# Altium PCB LINUX.PcbDoc
Units mm, origin at the board's own origin, x right, y up, seen from the top; angles counter-clockwise.
Board outline 120.4 x 55 mm, 2 copper layers (Top Layer, Bottom Layer); 73 components, 34 nets, 193 pads, 136 vias.
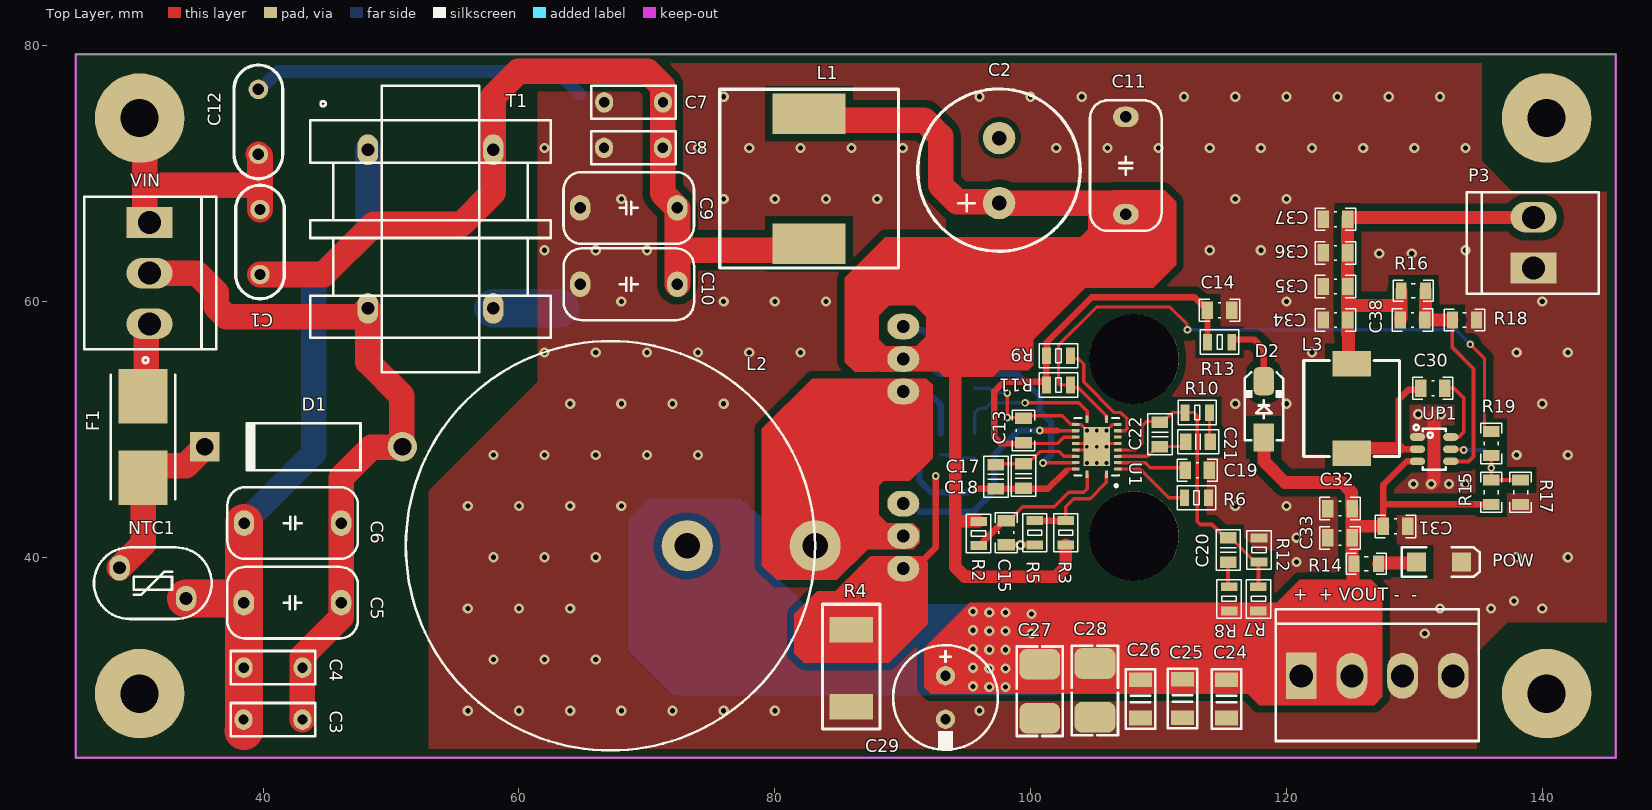
[diagram p0: Top Layer view]
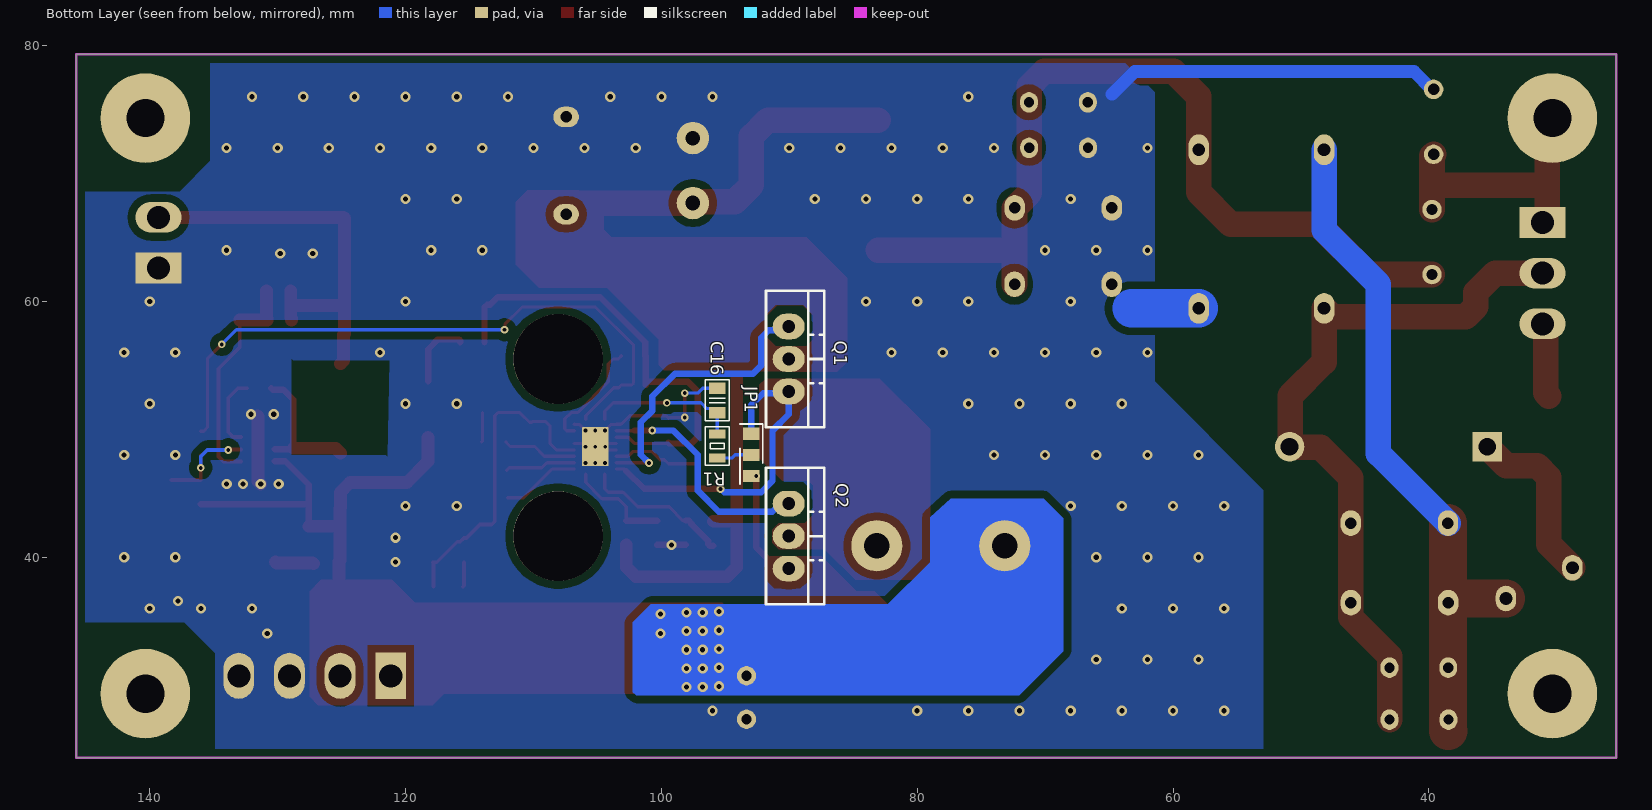
[diagram p1: Bottom Layer view, seen from below]
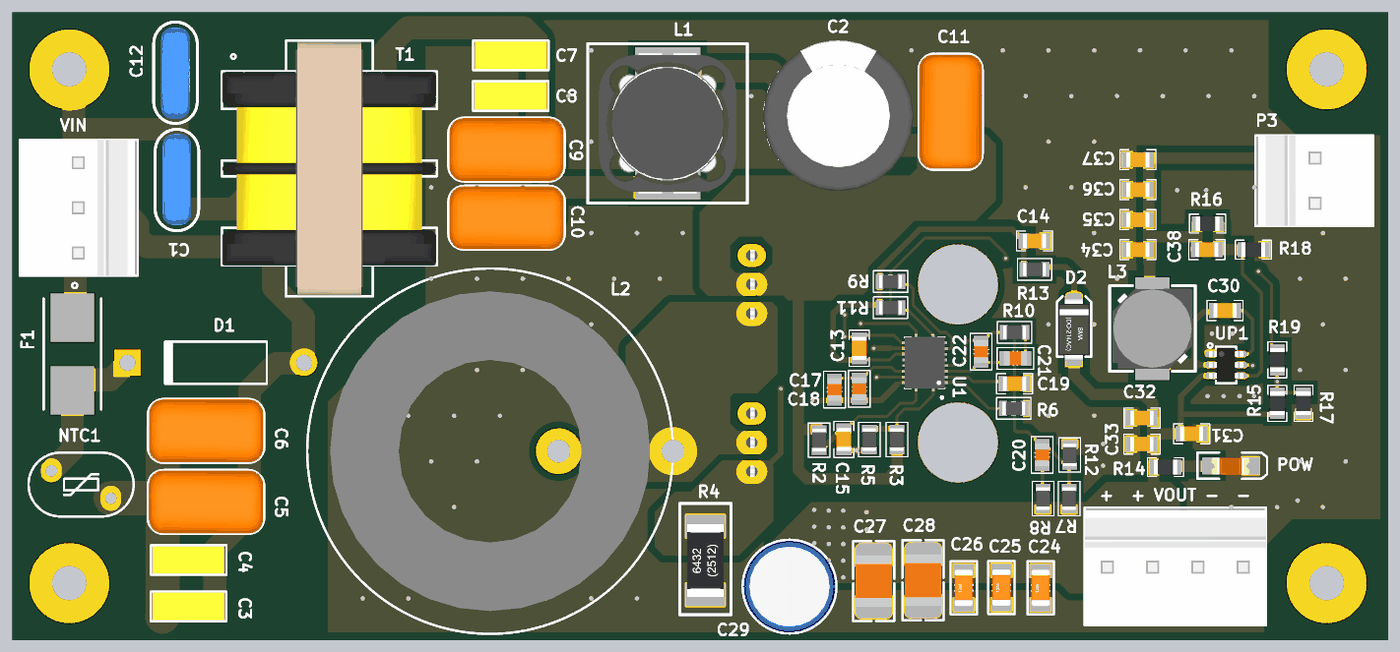
[diagram p2: 3D render of the assembled board from above, using the file's embedded part models]
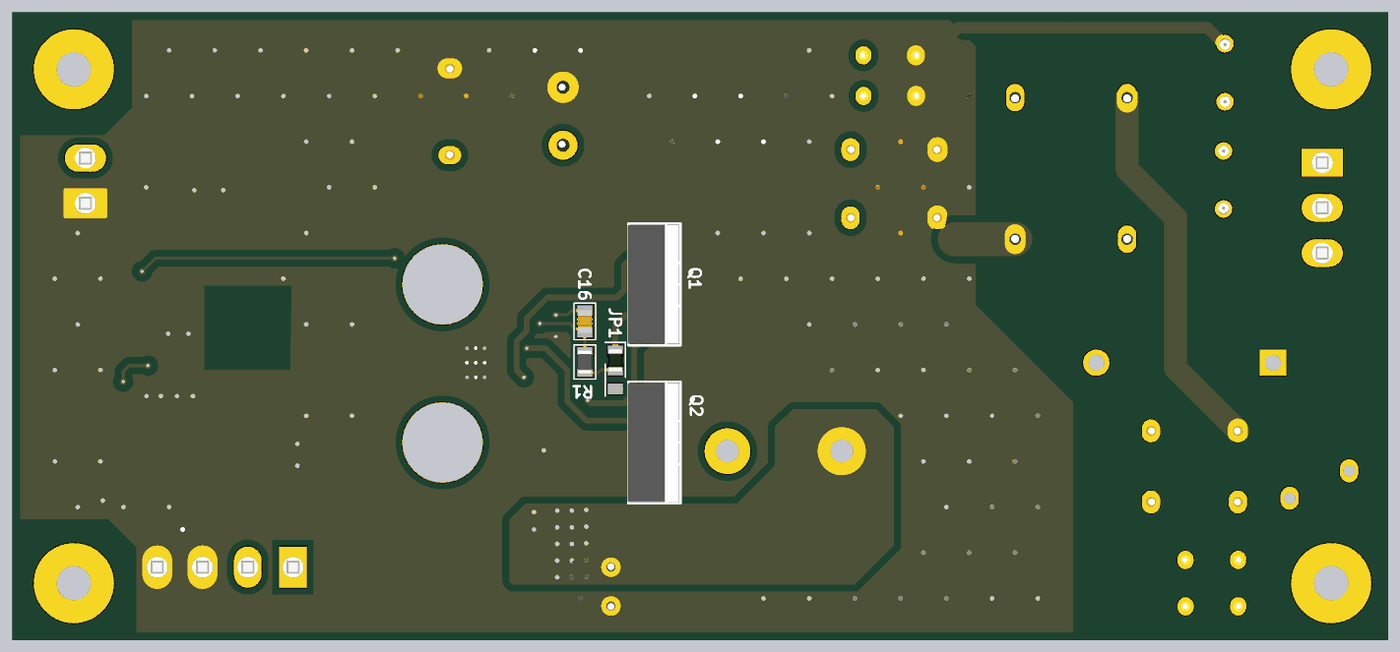
[diagram p3: 3D render of the assembled board from below, using the file's embedded part models]

## Layer stack, top to bottom
Top Solder: solder mask 0.0102, Solder Resist, Dk 3.5
Top Layer: signal copper 0.0356
Dielectric 1: dielectric 0.32, FR-4, Dk 4.8
Bottom Layer: signal copper 0.0356
Bottom Solder: solder mask 0.0102, Solder Resist, Dk 3.5

## Board outline
25.335,24.337 25.335,79.337 145.731,79.337 145.731,24.337

## Design rules (kind name [scope] priority, off if disabled: settings)
Clearance [All] p1: gap=0.3 ignorepadtopadclearanceinfootprint=FALSE except(0.2: Arc-Arc Arc-Track Arc-SMDPad Track-Track Track-SMDPad SMDPad-SMDPad; 0.254: Arc-THPad Arc-Via Arc-Text Track-THPad Track-Via Track-Text SMDPad-THPad SMDPad-Via SMDPad-Text THPad-THPad THPad-Via THPad-Text Via-Via Via-Text Fill-Text Poly-Text Region-Text Text-Text)
Height [All] p1: minheight=0 maxheight=80 prefheight=12.7
PolygonConnect [All] p1: connectstyle=Direct reliefconductorwidth=0.254 reliefentries=4 polygonreliefangle="90 Angle" airgapwidth=0.254
RoutingVias [All] p1: holewidth=0.4 width=0.8 viastyle="Through Hole" minholewidth=0.3 minwidth=0.6 maxholewidth=1.5 maxwidth=2.5
SolderMaskExpansion [All] p1: expansion=0.102 istentingtop=FALSE
Width [All] p1: maxlimit=3 minlimit=0.254 preferedwidth=0.5
29 further rules are at their usual default settings.

## Components (designator, comment, footprint, x,y, rotation, side; value= is the part's Value field where it differs from the comment)
"+  + VOUT -  -" "CONN_PWL_4" PWL_4 127.098,30.734 r0 top (schematic designator OUTPUT)
C1 "C_NP_200" "Cap_HV 5" 39.751,67.183 r270 top
C2 "150uF/100V" CAP-0.5in 97.49,70.089 r90 top
C3 "100nF" C_PLY_6X2_5 40.767,27.305 r180 top
C4 "470nF" C_PLY_6X2_5 40.781,31.369 r180 top
C5 "1uF" C_PLY_10X5 42.291,36.449 r180 top
C6 "2.2uF" C_PLY_10X5 42.301,42.672 r180 top
C7 "100nF" C_PLY_6X2_5 68.961,75.565 r0 top
C8 "470nF" C_PLY_6X2_5 68.947,72.009 r0 top
C9 "1uF" C_PLY_10X5 68.58,67.31 r0 top
C10 "2.2uF" C_PLY_10X5 68.59,61.341 r0 top
C11 "2.2uF" C_PLY_10X5 107.442,70.622 r270 top
C12 "C_NP_200" "Cap_HV 5" 39.624,71.501 r90 top
C13 "10uF" CAP0805 99.441,49.911 r90 top
C14 "100nF" CAP0805 114.775,59.309 r0 top
C15 "100nF" CAP0805 98.095,41.92 r270 top
C16 "100nF" C0805 95.631,52.258 r270 bottom
C17 "100nF" C0805 99.441,46.355 r90 top
C18 "100nF" C0805 97.282,46.294 r90 top
C19 "56nF" CAP0805 113.03,46.803 r0 top
C20 "820pF" C0805 115.443,40.564 r90 top
C21 "8.2nF" C0805 113.096,49.022 r180 top
C22 "470pF" C0805 110.109,49.606 r270 top
C24 "1nF" C1206 115.316,28.932 r90 top
C25 "100nF" C1206 111.887,28.956 r90 top
C26 "10uF" C1206 108.585,28.932 r90 top
C27 "100uF" C1812 100.711,29.523 r90 top
C28 "100uF" C1812 105.029,29.591 r90 top
C29 "220uF" C_EL_8X12 93.345,29.034 r270 top
C30 "100nF" CAP0805 131.445,53.213 r180 top
C31 "10uF" CAP0805 128.524,42.418 r0 top
C32 "100nF" CAP0805 124.183,43.801 r180 top
C33 "10uF" CAP0805 124.178,41.515 r180 top
C34 "10uF" CAP0805 123.825,58.547 r180 top
C35 "100nF" CAP0805 123.825,61.172 r180 top
C36 "10uF" CAP0805 123.825,63.796 r180 top
C37 "10uF" CAP0805 123.825,66.421 r180 top
C38 "100nF" CAP0805 129.86,58.547 r180 top
D1 "1.5KE120" A-500 43.158,48.641 r180 top
D2 "SS34" D_SMA 118.237,51.562 r90 top
F1 "0154004.DR" FUSE_0154004.DR 30.607,49.403 r270 top
JP1 "Jumper" "Jumper Selector SMD" 92.964,48.007 r270 bottom
L1 "=Value" CDRH127 82.677,69.596 r0 top
L2 "=Value" L_TOR 83.152,40.894 r180 top
L3 "22uH" CDRH74 125.095,51.633 r0 top
NTC1 "NTC-05D-15" MOV_7D 31.369,37.973 r0 top
P3 "CONN_PWL_2" PWL_2 139.319,64.591 r90 top
POW "LED0805" "LED SMD 1206" 131.925,39.624 r0 top (schematic designator POW1)
Q1 "IRF5305" TO220_3 90.043,55.499 r270 bottom
Q2 "IRF5305" TO220_3 90.043,41.656 r270 bottom
R1 "18k" R_0805 95.631,48.702 r270 bottom
R2 "2.1R" R_0805 95.936,41.859 r90 top
R3 "75k" R_0805 102.743,41.91 r90 top
R4 "10mR" R2512 85.979,31.321 r90 top
R5 "7.8k" R_0805 100.33,41.91 r270 top
R6 "39.2k" R_0805 112.964,44.644 r0 top
R7 "18k" R_0805 117.805,36.744 r90 top
R8 "24.9R" R_0805 115.519,36.744 r90 top
R9 "10k" R_0805 102.184,55.753 r180 top
R10 "2.87k" R_0805 113.03,51.308 r0 top
R11 "10k" R_0805 102.184,53.467 r180 top
R12 "1.27k" R_0805 117.856,40.564 r90 top
R13 "2.1R" R_0805 114.775,56.82 r180 top
R14 "4.7K" RES0805 126.238,39.497 r180 top
R15 "4.7K" RES0805 136.017,45.085 r270 top
R16 "15K" RES0805 129.921,60.833 r0 top
R17 "1K" RES0805 138.303,45.085 r90 top
R18 "2K" RES0805 133.919,58.547 r180 top
R19 "1K" RES0805 136.017,48.895 r90 top
T1 "EMI_TRANS" CMCHOKE_UU16 53.086,65.659 r180 top
U1 "LM5146" QFN50P450X350X100-21N 105.169,48.641 r180 top
UP1 "TPS54202" SOT23_6 131.542,48.448 r0 top
VIN "CONN_PWL_3" PWL_3 31.115,62.207 r270 top (schematic designator P1)

## Footprints (in the part's own frame and the unit in brackets; to place one, negate y for a bottom-side part, rotate by r counter-clockwise, add the part's x,y. Pads: shape width x height; smd on the part's side, far side on the other; paste and mask are expansions set on the pad)
A-500 [mm] "Diode, Axial; Body 8.9 x 3.7 mm (LxDia. max), Lead Dia. 1.09 mm (max)"
  round 2.3 hole 1.4: 1(-7.725,0)
  rect 2.3x2.3 hole 1.4: 2(7.725,0)
  silkscreen extent -4.45,-1.85 4.55,1.85
C0805 [mm] "Capacitor Pattern"
  rect 0.9x1.3 smd: 1(-0.95,0) 2(0.95,0)
  silkscreen extent -1.6,-0.95 1.6,0.95, body extent -1,-0.63 1,0.62, height 0.6
C1206 [mm]
  rect 1.15x1.8 smd: 1(-1.5,0) 2(1.5,0)
  silkscreen extent -2.32,-1.15 2.33,1.15, body extent -1.6,-0.8 1.6,0.8, height 1
C1812 [mm] "Chip Capacitor, 4.5x3.2mm, 1612, 1812, 4532"
  rrect50% 2.4x3.2 smd mask+0.075: 1(-2.1,0) 2(2.1,0)
  silkscreen extent -3.5,-1.8 3.5,1.8, body extent -2.25,-1.6 2.25,1.6, height 2.5
C_EL_8X12 [mm] "Cap Elec, D8.0X12.0H pitch: 3.5mm, RB.14/.26, RB.15/.32"
  round 1.5 hole 0.8: 1(-1.7,0) 2(1.7,0)
  silkscreen extent -4.1,-4.1 4.1,4.1, body extent -4.02,-4.03 4.03,4.03, height 2.98
C_PLY_6X2_5 [mm] "CAP, FILM MKT, 6.3X2.4mm, pitch: 4.7mm"
  oval 1.4x1.6 hole 0.8 mask+0.075: 1(-2.3,0) 2(2.3,0)
  silkscreen extent -3.3,-1.3 3.3,1.3, body extent -3.15,-1.2 3.15,1.2, height 6.34
C_PLY_10X5 [mm] "CAP, POLYESTER, 10X5.5mm pitch: 7.6mm"
  oval 1.6x2 hole 0.9 unplated mask+0.075: 1(-3.8,0) 2(3.8,0)
  silkscreen extent -5.1,-2.8 5.1,2.8, body extent -5,-2.75 5,2.75, height 9
CAP0805 [mm] "Chip Capacitor, 2-Leads, Body 2/00x1/25mm, IPC Medium Density DESIGNER:ABBAS BASEREH"
  rect 0.9x1.35 smd: 1(-0.95,0) 2(0.95,0)
  silkscreen extent -1.58,-0.87 1.58,0.87, body extent -1.02,-0.65 1.02,0.65, height 0.5
CAP-0.5in [mil]
  round 100 hole 45: 1(105.59,-1.82) 2(-94.41,-1.82)
  silkscreen extent -243,-251 257,249, body extent -253,-265 267,255, height 1000
"Cap_HV 5" [mil]
  round 60 hole 35: 1(0,0) 2(200,0)
  silkscreen extent -75,-75 275,75, body extent -59,-50 256,49, height 453
CDRH74 [mm]
  rect 3x2 smd: 1(0,3.5) 2(0,-3.5)
  silkscreen extent -3.75,-3.75 3.75,3.75, body extent -3.5,-3.52 3.5,3.53, height 4.5
CDRH127 [mm]
  rect 5.715x3.175 smd: 1(0,5.08) 2(0,-5.08)
  silkscreen extent -6.98,-6.98 6.98,6.98, body extent -6,-6.17 6,6.17, height 6.23
CMCHOKE_UU16 [mm] "COMMON MODE CHOKE, UU16, UT2024"
  oval 1.6x2.4 hole 1: 1(4.9,-6.2) 2(-4.9,-6.2) 3(-4.9,6.2) 4(4.9,6.2)
  silkscreen extent -9.4,-11.2 9.4,11.2, body extent -9.35,-11.1 9.35,11.13, height 25.65
D_SMA [mm] "SMA Molded Diode, 2-Leads, Body 4.3x2.7mm, SOD-128"
  rect 2.2x1.6 smd paste-0.1: 1(-2.2,0)
  rrect50% 2.2x1.6 smd paste-0.1: 2(2.2,0)
  silkscreen extent -2.4,-1.5 2.9,1.5, body extent -2.75,-1.4 2.75,1.4, height 2.6
FUSE_0154004.DR [mm]
  rect 4.24x3.81 smd: 1(-3.19,0) 2(3.19,0)
  silkscreen extent -6.22,-2.51 4.86,2.51
"Jumper Selector SMD" [mm]
  rect 0.95x1.3 smd: 1(-1.65,0) 2(0,0) 3(1.65,0)
  silkscreen extent -2.41,-0.89 2.29,0.89, body extent -1.85,-0.64 0.18,0.64, height 0.6
L_TOR [mm]
  round 4 hole 2: 1(0,0) 2(10,0)
  silkscreen extent 0,-16 32,16, body extent 2.11,-13.97 30,13.97, height 11
"LED SMD 1206" [mm]
  rect 1.5x1.5 smd: 1(-1.75,0) 2(1.75,0)
  silkscreen extent -2.9,-1.15 3.2,1.15, body extent -1.65,-0.76 1.65,0.69, height 1.36
MOV_7D [mm] "VDR, VARISTOR, 9X5.6, pitch: 5.0mm, 275VAC(RMS)"
  oval 1.6x2 hole 1: 1(-2.6,1.2) 2(2.6,-1.2)
  silkscreen extent -4.6,-2.8 4.6,2.8, body extent -4.49,-2.8 4.49,2.8, height 12.5
PWL_2 [mm] "Connector; Header; 2 Position"
  rect 2.4x3.6 hole 1.8: 1(-1.98,0)
  oval 2.4x3.6 hole 1.8: 2(1.98,0)
  silkscreen extent -3.98,-5.1 3.96,5.21, body extent -3.96,-5 3.96,5, height 13.5
PWL_3 [mm] "Connector; Header; 3 Position"
  rect 2.4x3.6 hole 1.8: 1(-3.96,0)
  oval 2.4x3.6 hole 1.8: 2(0,0) 3(3.96,0)
  silkscreen extent -5.96,-5.1 5.94,5.21, body extent -5.94,-5 5.94,5, height 13.5
PWL_4 [mm] "Connector; Header; 4 Position"
  rect 2.4x3.6 hole 1.8: 1(-5.94,0)
  oval 2.4x3.6 hole 1.8: 2(-1.98,0) 3(1.98,0) 4(5.94,0)
  silkscreen extent -7.94,-5.1 7.92,5.21, body extent -7.92,-5 7.92,5, height 13.5
QFN50P450X350X100-21N [mm]
  rrect25% 0.24x0.6 smd mask+0: 1(-0.75,2.15) 10(-0.75,-2.15) 11(0.75,-2.15) 20(0.75,2.15)
  rrect25% 0.6x0.24 smd mask+0: 2(-1.65,1.75) 3(-1.65,1.25) 4(-1.65,0.75) 5(-1.65,0.25) 6(-1.65,-0.25) 7(-1.65,-0.75) 8(-1.65,-1.25) 9(-1.65,-1.75) 12(1.65,-1.75) 13(1.65,-1.25) 14(1.65,-0.75) 15(1.65,-0.25) 16(1.65,0.25) 17(1.65,0.75) 18(1.65,1.25) 19(1.65,1.75)
  round 0.4 hole 0.3 mask+0: 21(-0.775,0) 21(-0.762,1.27) 21(-0.762,-1.27) 21(0,1.275) 21(0,0) 21(0,-1.275) 21(0.762,1.27) 21(0.762,-1.27) 21(0.775,0)
  rrect5% 2.05x3.05 smd paste-3 mask+0: 21(0,0)
  rrect5% 2.05x3.05 smd far side paste-3 mask+0: 21(0,0)
  silkscreen extent -1.75,-2.25 1.75,3.15, body extent -1.75,-2.25 1.75,2.25, height 1
R2512 [mm]
  rect 2x3.4 smd: 1(-3,0) 2(3,0)
  silkscreen extent -4.75,-2.25 5,2.25, body extent -3.2,-1.6 3.2,1.6, height 0.6
R_0805 [mm] "Resistor Pattern"
  rect 0.7x1.3 smd: 1(-0.95,0) 2(0.95,0)
  silkscreen extent -1.5,-0.95 1.5,0.95, body extent -1,-0.6 1,0.6, height 0.5
RES0805 [mm] "Chip Resistor, 2-Leads, Body 2/00x1/25mm, IPC Medium Density DESIGNER:ABBAS BASEREH"
  rect 0.85x1.3 smd: 1(-0.95,0) 2(0.95,0)
  silkscreen extent -1.58,-0.82 1.58,0.82, body extent -1.02,-0.65 1.02,0.65, height 0.5
SOT23_6 [mm] "SOT-23-6, DDC, DBV, MICRO6, SOT-26, SOT457, SuperSOT6, TSOP-6, HMC313, TSOT, 1.5x3mm, Pitch 0.65mm, CA531, MO-178AB, MO-193AA"
  oval 1.2x0.6 smd paste-0.05: 1(-1.3,0.95) 2(-1.3,0) 3(-1.3,-0.95) 4(1.3,-0.95) 5(1.3,0) 6(1.3,0.95)
  silkscreen extent -1.6,-1.6 0.9,1.9, body extent -1.5,-1.5 1.5,1.5, height 1.3
TO220_3 [mm] "TO-220 3 LEAD, TO-262, pitch: 2.54mm  10x4.5mm"
  oval 2x2.5 hole 1: 1(-2.54,0) 2(0,0) 3(2.54,0)
  silkscreen extent -5.33,-1.78 5.33,2.79, body extent -5.2,-1.85 5.2,2.65, height 19

## Part data
"+  + VOUT -  -": "Power Terminal 4pin,Header, 4-Pin"
C2: library part "Cap Elec"
C3 C4 C5 C6 C7 C8 C9 C10 C11: library part CAP_THD_FILM_POLYESTER, "CAP, FILM,", ASSEMBLY=ASSEMBLY, DESC="CAP, FILM,", MANF=MANF, MANF_P#=MANF_PART#, PARAM2=400V, PRICE="100= 1$"
C13 C14 C15 C19 C24 C25 C26: library part "Cap 1206", "Capacitor"
C16 C17 C18 C20 C21 C22: library part "Cap 0805", "Capacitor"
C27 C28: library part CAP_SMD_MLCC, "CAP, MLCC, 1nF, 50V, C0G, 10%, 0402", ASSEMBLY=ASSEMBLY, DESC="CAP, MLCC, 1nF, 50V, C0G, 10%, 0402", MANF=Murata, MANF_P#=MANF_PART#, PARAM="C0G, 10%", PARAM2=50V, PRICE="100= 1$"
C29: library part CAP_THD_EL_8X12, "CAP, THD, ELEC,", ASSEMBLY=ASSEMBLY, DESC=DESCRIPTION, DIST#=MOUSER, MANF=MANF, MANF_P#=MANF_PART#, PARAM=20%, PARAM2=25V, PRICE="10= 5$"
C30 C31 C32 C33 C34 C35 C36 C37 C38: library part "CAP SMD PACKAGE", "TOTAL CAPACITOR SMD PACK", Data=2017-3-10, Desc.="CAP SMD TOTAL PACKAGES", Designer="Abbas Basereh"
D1: library part 1N5352B, "Silicon Zener Diode", ComponentLink1Description="Manufacturer Link", ComponentLink1URL=http://www.vishay.com/, LatestRevisionDate=17-Jul-2002, LatestRevisionNote="Re-released for DXP Platform.", PackageReference=A-500, Published=8-Jun-2000, Publisher="Altium Limited"
D2: library part DIODE_SMD_SCHOTTKY_SS34, "DIODE, SCHOTTKY, 20V, 3A", ASSEMBLY=ASSEMBLY, DESC=DESCRIPTION, MANF=VISHAY, MANF_P#=SS34, PARAM=20V, PARAM2=3A, PRICE=PRICE
F1: "154/154T/154L/154TL Series OMNI-BLOKÂ® Fuse and Holder Assembly", Package=None, Availability=Unavailable, MP=0154004.DR, PRICE=None
JP1: library part "Jumper Selector", "Jumper Selector"
L1 L3: library part L_CDRH127, "Inductor"
  L1: 10uH=10uH
L2: library part L_TOR, "Inductor", 15uH=15uH
NTC1: library part VARISTOR, "Varistor (Metal Oxiade Varistor)", MANF=MANF, MANF_P#=MANF_P#, PARAM=V, PARAM2=PARAM2
P3: "Power Terminal 2pin,Header, 2-Pin"
POW: library part LED_SMD_0805, "LED, SMD, 0805", ASSEMBLY=ASSEMBLY, DESC=DESCRIPTION, MANF=MANF, MANF_P#=MANF_PART#, PARAM2=2.2V, PRICE=PRICE
Q1 Q2: library part MOSP_IRF5305_TO220, "MOSFET P-CHANNEL, 55V, -31A, 6mO, Vth-4.0", ASSEMBLY=ASSEMBLY, MANF_P#=IRF5305
R1 R2 R3 R5 R6 R7 R8 R9 R10 R11 R12 R13: library part "Res 0805", "Resistor"
R4: library part "Res 2512", "Resistor"
R14 R15 R16 R17 R18 R19: library part "RES SMD PACKAGE", "TOTAL SMD RESISTOR PACK", Data=2017-3-10, Desc.="RES SMD PAKAGES", Designer="Abbas Basereh"
U1: library part LM5146RGYR, "Sycncronus Buck controller"
UP1: library part VREG_TPS54202, "REG, Switching, Buck, 2A, ADJ, 500KHz, 4.5~28VIN, SOT23-6", ASSEMBLY=ASSEMBLY, DESC="REG, Switching, Buck, 2A, ADJ, 500KHz, 4.5~28VIN, SOT23-6", MANF=TI, MANF_P#=TPS54202DDC, PARAM="2A, ADJ", PARAM2="500KHz, 4.5~28VIN", PRICE=2200t@LION
VIN: "Power Terminal 3pin,Header, 3-Pin"
C1 C12: 2.2nF=2.2nF

## Free pads (board coordinates)
  round 7 hole 3: 1(30.335,29.337) 2(30.335,74.337) 3(140.335,29.337) 3(140.335,74.337)
  round 7 hole 7: 4(108.077,41.656) 4(108.077,55.499)

## Via types
v1: diameter 0.8, hole 0.4, Top Layer to Bottom Layer, tented both sides, 125 vias
v2: diameter 0.6, hole 0.3, Top Layer to Bottom Layer, tented both sides, 11 vias

## Nets (pads, with @x,y where several pads share a name; then routed paths per layer and width w, separated by ;. In a path a pad name is that pad's centre, name@x,y a point inside that pad or via, vN(x,y) a via of type N, cw(c..) or ccw(c..) an arc to the next point about the centre after c; other vN are vias at no path point)
+5V: C34.1 C35.1 C36.1 C37.1 C38.2 L3.1 P3.2 R16.1 | length 32.6
  Top Layer w1: L3.1 124.841,55.387 124.841,57.404 124.775,57.47 C34.1 124.775,59.859 ; C38.2 128.91,58.672 128.971,58.733 R16.1 ; 128.94,59.69 124.944,59.69 124.775,59.859 ; P3.2 124.825,66.571 124.775,66.521 C37.1 C36.1 C35.1 124.775,59.859
+12V: "+  + VOUT -  -.1" "+  + VOUT -  -.2" C24.2 C25.2 C26.2 C27.2 C28.2 C29.1 C31.1 C32.1 C33.1 D2.1 L2.2 R7.1 R8.1 R14.2 R15.2 UP1.3 | length 85.4
  Top Layer w0.5: C31.1 127.574,44.038 ; UP1.3 129.413,47.498 127.574,45.659 127.574,44.038 ; R15.2 127.671,44.135 127.574,44.038
  Top Layer w1: R8.1 R7.1 119.527,35.794 121.158,34.163 121.158,30.734 ; D2.1 118.237,47.498 119.888,45.847 124.333,45.847 125.095,45.085 125.095,43.839 C32.1 125.131,43.798 125.131,41.517 C33.1 ; 125.118,30.734 125.213,30.829 125.213,39.647 125.133,39.727 125.133,42.463 125.178,42.418 C31.1
  Top Layer w2: C29.1 94.302,31.691 96.388,31.691 v1(96.774,31.305) 97.16,31.691 100.711,31.691 C28.2 105.429,31.691 106.386,30.734 121.158,30.734 125.118,30.734
  other v1: 96.774,29.845 98.044,29.845 95.504,29.909 98.044,31.305 95.504,31.369 96.774,32.766 98.044,32.766 95.504,32.829 100.076,34.036 96.774,34.227 98.044,34.227 95.504,34.29 100.076,35.56 96.774,35.687 98.044,35.687 95.504,35.75
CGND: C1.1 C12.1 pad.2 VIN.1 | length 21.8
  Top Layer w2: pad.2 30.725,73.947 30.725,69.088 ; VIN.1 30.925,66.167 30.725,66.367 30.725,69.088 ; 39.497,69.215 39.37,69.088 30.725,69.088 ; C12.1 39.751,71.374 C1.1
HO: Q1.1 U1.18 | length 22.6
  Top Layer w0.254: v2(100.965,47.371) 100.978,47.384 103.512,47.384 U1.18
  Bottom Layer w0.5: Q1.1 90.33,57.752 91.6,57.752 92.202,57.15 92.202,54.991 92.837,54.356 98.933,54.356 100.711,52.578 100.711,51.435 101.6,50.546 101.6,48.006 v2(100.965,47.371)
ILIM: C16.2 R1.1 U1.11 | length 11.7
  Top Layer w0.254: v2(99.568,52.07) 103.759,52.07 104.419,51.41 U1.11
  Bottom Layer w0.254: R1.1 C16.2 95.942,51.619 96.45,51.619 96.901,52.07 v2(99.568,52.07)
LO: Q2.1 U1.13 | length 18
  Top Layer w0.3: 102.125,49.891 U1.13
  Top Layer w0.5: v2(100.711,49.911) 102.105,49.911
  Bottom Layer w0.5: Q2.1 90.699,44.196 91.334,43.561 95.504,43.561 97.155,45.212 97.155,48.006 99.06,49.911 v2(100.711,49.911)
NetC1_2: C1.2 C7.2 C8.2 C9.2 C10.2 L1.2 T1.2 | length 69.6
  Top Layer w2: C1.2 44.704,62.103 48.641,66.04 55.499,66.04 57.986,68.527 T1.2 57.986,76.02 59.949,77.983 70.075,77.983 71.247,76.811 C8.2 71.247,68.443 C9.2 72.39,67.3 72.39,64.008 ; C10.2 72.39,64.008 ; L1.2@83.058,64.008 72.39,64.008
NetC3_1: C3.1 C4.1 C5.1 C6.1 D1.1 T1.4 VIN.2 | length 57.3
  Top Layer w2: VIN.2 34.821,62.207 36.322,60.706 36.322,59.592 37.11,58.804 47.531,58.804 47.986,59.259 T1.4 48.186,55.259 50.826,52.619 50.826,48.698 D1.1 50.826,48.584 48.457,48.584 46.101,46.228 C6.1 46.091,42.662 C5.1 46.091,35.296 43.067,32.272 C3.1
NetC3_2: C3.2 C4.2 C5.2 C6.2 NTC1.2 T1.1 | length 54.1
  Top Layer w3: NTC1.2 38.167,36.773 C5.2 ; 38.481,26.416 38.501,26.436 C6.2
  Bottom Layer w2: C6.2 43.942,48.113 43.942,61.341 48.186,65.585 T1.1
NetC15_1: C15.1 R2.1 U1.20 | length 11.6
  Top Layer w0.254: C15.1 98.32,42.87 99.392,43.942 101.854,43.942 102.997,45.085 104.14,45.085 104.419,45.364 U1.20
  Top Layer w0.5: R2.1 96.236,40.909 96.336,41.009 96.336,41.266 97.67,42.6 97.67,42.67 97.87,42.87 C15.1
NetC17_2: C17.2 C18.2 U1.17 | length 6.8
  Top Layer w0.254: C18.2 97.343,47.305 C17.2 99.764,47.628 100.079,47.628 100.711,48.26 102.235,48.26 102.604,47.891 U1.17
NetC19_1: C19.1 U1.3 | length 5.5
  Top Layer w0.254: U1.3 108.946,47.391 109.347,46.99 111.893,46.99 C19.1
NetC20_1: C20.1 R8.2 | length 2
  Top Layer w0.3: C20.1 115.443,37.77 R8.2
NetC20_2: C20.2 C22.1 R7.2 R10.1 R12.1 U1.5 | length 24.7
  Top Layer w0.254: U1.5 108.208,48.391 108.712,48.895 108.712,50.292 109.027,50.607 C22.1@110.109,50.607 ; C22.1 110.309,50.556 111.061,51.308 R10.1 112.776,51.308 113.03,51.054 113.03,42.799
  Top Layer w0.3: 113.03,42.799 113.256,42.573 114.184,42.573 115.243,41.514 C20.2 115.743,41.214 115.956,41.214 117.556,39.614 R12.1 117.805,39.563 R7.2
NetC21_1: C21.1 R10.2 | length 2.3
  Top Layer w0.254: R10.2 113.98,49.088 C21.1
NetC21_2: C21.2 C22.2 U1.4 | length 5.8
  Top Layer w0.254: U1.4 109.144,47.891 109.909,48.656 C22.2 111.823,48.656 112.146,48.979 C21.2
NetC30_1: C30.1 UP1.6 | length 5.6
  Top Layer w0.3: C30.1 133.096,53.213 133.858,52.451 133.858,49.784 133.477,49.403 132.847,49.403 UP1.6
NetC30_2: C30.2 L3.2 UP1.2 | length 11.2
  Top Layer w0.5: UP1.2 128.844,48.448 128.778,48.514 128.778,52.324 129.54,53.086 130.368,53.086 C30.2
  Top Layer w1: L3.2 125.476,48.514 128.778,48.514
NetC38_1: C38.1 R16.2 R18.2 UP1.4 | length 17.8
  Top Layer w0.3: UP1.4 134.239,47.498 134.62,47.879 134.62,54.737 132.969,56.388 R18.2
  Top Layer w1: R16.2 130.871,58.733 130.81,58.672 C38.1 R18.2
NetD1_2: D1.2 F1.2 NTC1.1 | length 13.7
  Top Layer w2: NTC1.1 30.607,41.011 F1.2@30.607,46.243 ; F1.2 F1.2@30.607,46.243 ; D1.2 33.94,47.148 31.512,47.148 F1.2@30.607,46.243
NetD2_2: D2.2 R13.1 | length 5.5
  Top Layer w0.5: R13.1 115.725,56.923 115.825,57.023 117.475,57.023 118.237,56.261 D2.2
NetF1_1: F1.1 VIN.3 | length 5.9
  Top Layer w2: F1.1 30.861,52.847 30.861,58.062 31.046,58.247 VIN.3
NetJP1_2: JP1.2 R1.2 | length 2.8
  Bottom Layer w0.254: JP1.2 94.233,48.007 94.488,47.752 R1.2
NetJP1_3: JP1.3 Q2.3 R4.2 | length 8.8
  Top Layer w0.254: Q2.3 90.678,39.116 91.186,39.624
  Top Layer w0.5: 91.186,39.624 91.44,39.624 92.583,40.767 v2(92.583,46.355)
NetPOW_1: POW.1 R14.1 | length 3
  Top Layer w1: R14.1 127.252,39.56 130.112,39.56 POW.1
NetR3_2: R3.2 R5.1 U1.1 | length 8.1
  Top Layer w0.254: R3.2 102.743,43.942 103.378,44.577 104.648,44.577 105.919,45.848 U1.1
  Top Layer w0.5: R5.1 R3.2
NetR6_1: R6.1 U1.2 | length 6.1
  Top Layer w0.254: U1.2 108.557,46.891 110.804,44.644 R6.1
NetR9_1: R9.1 U1.8 | length 8.9
  Top Layer w0.254: R9.1 103.134,55.722 103.357,55.499 103.759,55.499 104.15,55.108 104.15,53.711 106.553,51.308 107.061,51.308 107.549,50.82 107.549,50.04 107.4,49.891 U1.8
NetR15_1: R15.1 R17.2 R19.1 UP1.5 | length 8.5
  Top Layer w0.3: UP1.5 132.872,48.418 133.827,48.418 v2(133.858,48.387) ; R19.1 v2(136.017,46.99) R15.1 R17.2
  Bottom Layer w0.3: v2(133.858,48.387) 135.509,48.387 136.017,47.879 v2(136.017,46.99)
PGND: "+  + VOUT -  -.3" "+  + VOUT -  -.4" C2.1 C7.1 C8.1 C9.1 C10.1 C11.1 C12.2 C13.2 C14.2 C15.2 C16.1 C19.2 C24.1 C25.1 C26.1 C27.1 C28.1 C29.2 C31.2 C32.2 C33.2 C34.2 C35.2 C36.2 C37.2 P3.1 POW.2 R4.1 R5.2 R6.2 R12.2 R17.1 R18.1 T1.3 U1.6 U1.9 U1.12 U1.15 U1.16 U1.21 UP1.1 | length 57.2
  Top Layer w0.254: v2(98.171,52.832) v2(98.171,50.927) 99.375,50.927 C13.2 99.634,51.054 102.489,51.054 103.152,50.391 U1.12 103.526,50.384 103.934,50.384 U1.21@104.407,49.911 ; U1.16 104.879,48.391 U1.21@105.129,48.641 ; U1.15 104.879,48.891 U1.21@105.129,48.641 ; U1.21@105.931,49.911 106.404,50.384 106.812,50.384 U1.9 ; U1.6 105.459,48.891 105.209,48.641 105.169,48.641 U1.21@105.129,48.641
  Top Layer w0.5: C15.2 98.1,40.965 v1(99.212,40.965) 100.325,40.965 R5.2
  Top Layer w1: v1(131.318,45.72) 131.542,45.944 131.542,51.024 131.572,51.054
  Top Layer w2: C2.1 C2.1@97.605,72.84
  Bottom Layer w0.254: C16.1 95.636,53.213 96.774,53.213 97.155,52.832 v2(98.171,52.832)
  Bottom Layer w1: C12.2 39.766,76.581 41.163,77.978 62.992,77.978 64.77,76.2
  Bottom Layer w3: T1.3 63.249,59.459
  other v1: 56,28 60,28 64,28 68,28 72,28 76,28 80,28 96,28 58,32 62,32 66,32 130.81,34.036 56,36 60,36 64,36 132,36 136,36 140,36 137.795,36.576 120.777,39.624 58,40 62,40 66,40 138,40 142,40 120.777,41.529 56,44 60,44 64,44 68,44 116,44 120,44 129.921,45.72 132.715,45.72 133.985,45.72 58,48 62,48 66,48 70,48 74,48 138,48 142,48 130.302,51.181 132.08,51.181 64,52 68,52 72,52 76,52 116,52 120,52 140,52 62,56 66,56 70,56 74,56 78,56 82,56 122,56 138,56 142,56 68,60 76,60 80,60 84,60 120,60 140,60 127.254,63.754 129.794,63.754 62,64 66,64 70,64 114,64 118,64 134,64 68,68 76,68 80,68 84,68 88,68 116,68 120,68 62,72 74,72 78,72 82,72 86,72 90,72 102,72 106,72 110,72 114,72 118,72 122,72 126,72 130,72 134,72 76,76 96,76 100,76 104,76 112,76 116,76 120,76 124,76 128,76 132,76
PGOOD: R11.1 R19.2 U1.10 | length 50.5
  Top Layer w0.254: U1.10 105.912,50.798 105.912,51.06 103.716,53.256 103.346,53.256 R11.1 102.322,53.467 102.174,53.616 102.174,56.581 105.156,59.563 110.871,59.563 112.231,58.203 112.231,57.822 v2(112.268,57.785) ; v2(134.366,56.642) 135.494,55.514 135.494,50.143 135.792,49.845 R19.2
  Bottom Layer w0.254: v2(112.268,57.785) 133.223,57.785 v2(134.366,56.642)
SW: C17.1 C18.1 JP1.1 L2.1 Q1.3 Q2.2 U1.19 | length 26.2
  Top Layer w0.254: 102.743,46.736 102.898,46.891 U1.19
  Top Layer w0.5: v2(95.377,45.339) 95.379,45.341 97.28,45.341 C18.1 99.441,45.344 101.351,45.344 102.743,46.736
  Bottom Layer w0.5: Q1.3 90.043,51.181 91.313,49.911 91.313,45.974 92.202,45.085 95.096,45.085 95.35,45.339 v2(95.377,45.339) ; Q1.3@90.246,52.825 92.043,52.825 92.964,51.904 JP1.1
VCC: C13.1 C14.1 R9.2 R11.2 R13.2 U1.14 | length 35.2
  Top Layer w0.254: C13.1 99.507,48.895 102.108,48.895 102.604,49.391 U1.14
  Top Layer w0.5: C13.1 99.375,48.895 97.663,48.895 97.155,49.403 97.155,52.959 97.917,53.721 R11.2@101.234,53.721 ; R11.2 R11.2@101.234,53.721 ; R13.2 113.825,59.534 113.625,59.734 113.4,59.734 112.809,60.325 104.775,60.325 101.249,56.799 101.249,55.768 R9.2 R11.2@101.234,53.721
Vin: C2.2 C11.2 L1.1 Q1.2 R2.2 R3.1 | length 97.4
  Top Layer w1: 94.488,63.627 94.107,63.246 94.107,42.809 ; R2.2 94.107,42.809 ; R3.1 102.743,39.243 101.981,38.481 94.869,38.481 94.107,39.243 94.107,42.809
  Top Layer w2: L1.1@83.058,74.168 91.694,74.168 92.964,72.898 92.964,69.088 94.258,67.794 97.433,67.794 C2.2 106.573,67.691 C11.2 104.247,63.627 94.488,63.627 89.904,63.627 87.122,60.845 87.122,56.671 88.294,55.499 Q1.2
pads on no net: U1.7

## Polygon pours and split planes (outlines as drawn)
PGND on Bottom Layer "PGND_L02_P001" (solid, pour order 1): 145.709,79.316 64.566,79.316 64.484,79.399 61.436,76.351 61.436,53.745 52.927,45.236 52.927,24.369 52.935,24.36 52.983,24.408 145.637,24.408
PGND on Top Layer "PGND_L01_P000" (solid, remove dead copper, pour order 0): 145.742,79.293 64.598,79.293 64.516,79.375 61.468,76.327 61.468,53.721 52.959,45.212 52.959,24.346 52.968,24.337 53.015,24.384 145.669,24.384

## Keep-outs
Keep-Out Layer:
  the board outline again, w0.2

## Other copper
Top Layer:
  pour cut-out: 128.27,41.529 129.032,40.767 129.032,40.386 128.905,40.259 125.984,40.259 125.603,40.64 125.73,40.767 125.73,41.529 125.984,41.783
  pour cut-out: 110.363,53.34 111.379,52.324 111.379,52.197 110.617,51.435 109.728,51.435 109.601,51.562 109.601,52.705 109.855,52.959
  pour cut-out: 93.218,67.945 93.345,67.818 93.345,63.881 103.759,63.881 105.41,65.532 105.41,67.691 94.234,67.691 93.98,67.945
  pour cut-out: 121.285,55.372 128.778,55.372 128.905,55.499 128.905,48.006 121.539,48.006 121.412,47.879
  region net Vin: 89.535,56.515 91.059,56.515 91.821,57.277 91.821,58.801 90.932,59.69 88.011,59.69 87.63,60.071 89.662,62.103 96.52,62.103 96.647,62.23 104.775,62.23 104.775,61.595 100.203,57.023 100.203,54.991 99.822,54.61 97.536,54.61 97.028,54.102 93.218,54.102 92.798,54.522 86.702,54.522 86.487,54.737 86.487,55.626
  pour cut-out: 135.255,79.375 135.255,70.993 137.668,68.58 145.796,68.58 145.796,79.375
  pour cut-out: 145.669,34.925 137.287,34.925 134.874,32.512 134.874,24.384 145.669,24.384
  region net +12V: 117.856,28.448 126.873,28.448 127.508,29.083 127.508,37.338 126.619,38.227 121.031,38.227 119.253,36.449 95.25,36.449 91.694,32.893 91.694,29.845 92.202,29.337 95.631,29.337 116.967,29.337 117.602,28.702
  region net NetJP1_3: 87.464,40.093 84.709,37.338 83.312,37.338 81.534,35.56 81.534,32.512 82.296,31.75 88.9,31.75 91.948,34.798 91.948,39.603 91.474,40.093
  region net SW: 90.805,40.64 91.313,41.148 91.313,42.164 90.805,42.672 88.773,42.672 88.138,43.307 88.138,45.593 88.519,45.974 90.551,45.974 92.329,47.752 92.329,53.467 91.836,53.96 82.916,53.96 78.994,50.038 78.994,39.37 80.137,38.227 84.836,38.227 87.249,40.64
  region net Vin: 106.419,68.689 110.492,68.689 111.379,67.802 111.379,62.865 109.601,61.087 90.36,61.087 88.138,58.865 88.138,54.737 87.884,54.483 86.233,54.483 85.471,55.245 85.471,61.849 88.646,65.024 103.886,65.024 104.521,65.659 104.521,66.929 104.394,67.056
Bottom Layer:
  pour cut-out: 92.329,53.848 96.647,53.848 96.647,50.8 96.901,50.546 95.504,49.149 93.472,49.149 93.218,48.895 92.837,49.276 91.821,49.276
  pour cut-out: 121.285,55.372 128.778,55.372 128.905,55.499 128.905,48.006 121.539,48.006 121.412,47.879
  pour cut-out: 135.255,79.375 135.255,70.993 137.668,68.58 145.796,68.58 145.796,79.375
  pour cut-out: 145.669,34.925 137.287,34.925 134.874,32.512 134.874,24.384 145.669,24.384
  pour cut-out: 88.9,45.847 91.059,45.847 91.821,45.085 91.821,38.227 91.186,37.592 89.154,37.592 88.265,38.481 88.265,45.212
  pour cut-out: 88.9,59.69 91.059,59.69 91.821,58.928 91.821,52.07 91.186,51.435 89.154,51.435 88.265,52.324 88.265,59.055
  region net +12V: 82.296,36.322 100.838,36.322 102.235,34.925 102.235,29.464 101.981,29.21 93.98,29.21 93.599,29.591
  region net +12V: 77.39,44.577 70.104,44.577 68.58,43.053 68.58,32.639 72.009,29.21 85.471,29.21 96.266,29.21 96.647,29.591 96.647,31.877 94.869,33.655 87.503,33.655 84.836,36.322 82.296,36.322 78.994,39.624 78.994,43.126